# Altium PCB FlightController_Top.PcbDoc
Units mm, origin at the board's own origin, x right, y up, seen from the top; angles counter-clockwise.
Board outline 101.6 x 101.6 mm, 4 copper layers (Top Layer, Internal Plane 1, Internal Plane 2, Bottom Layer); 156 components, 161 nets, 856 pads, 0 vias.
Unrouted connection lines stored in the file: 589.
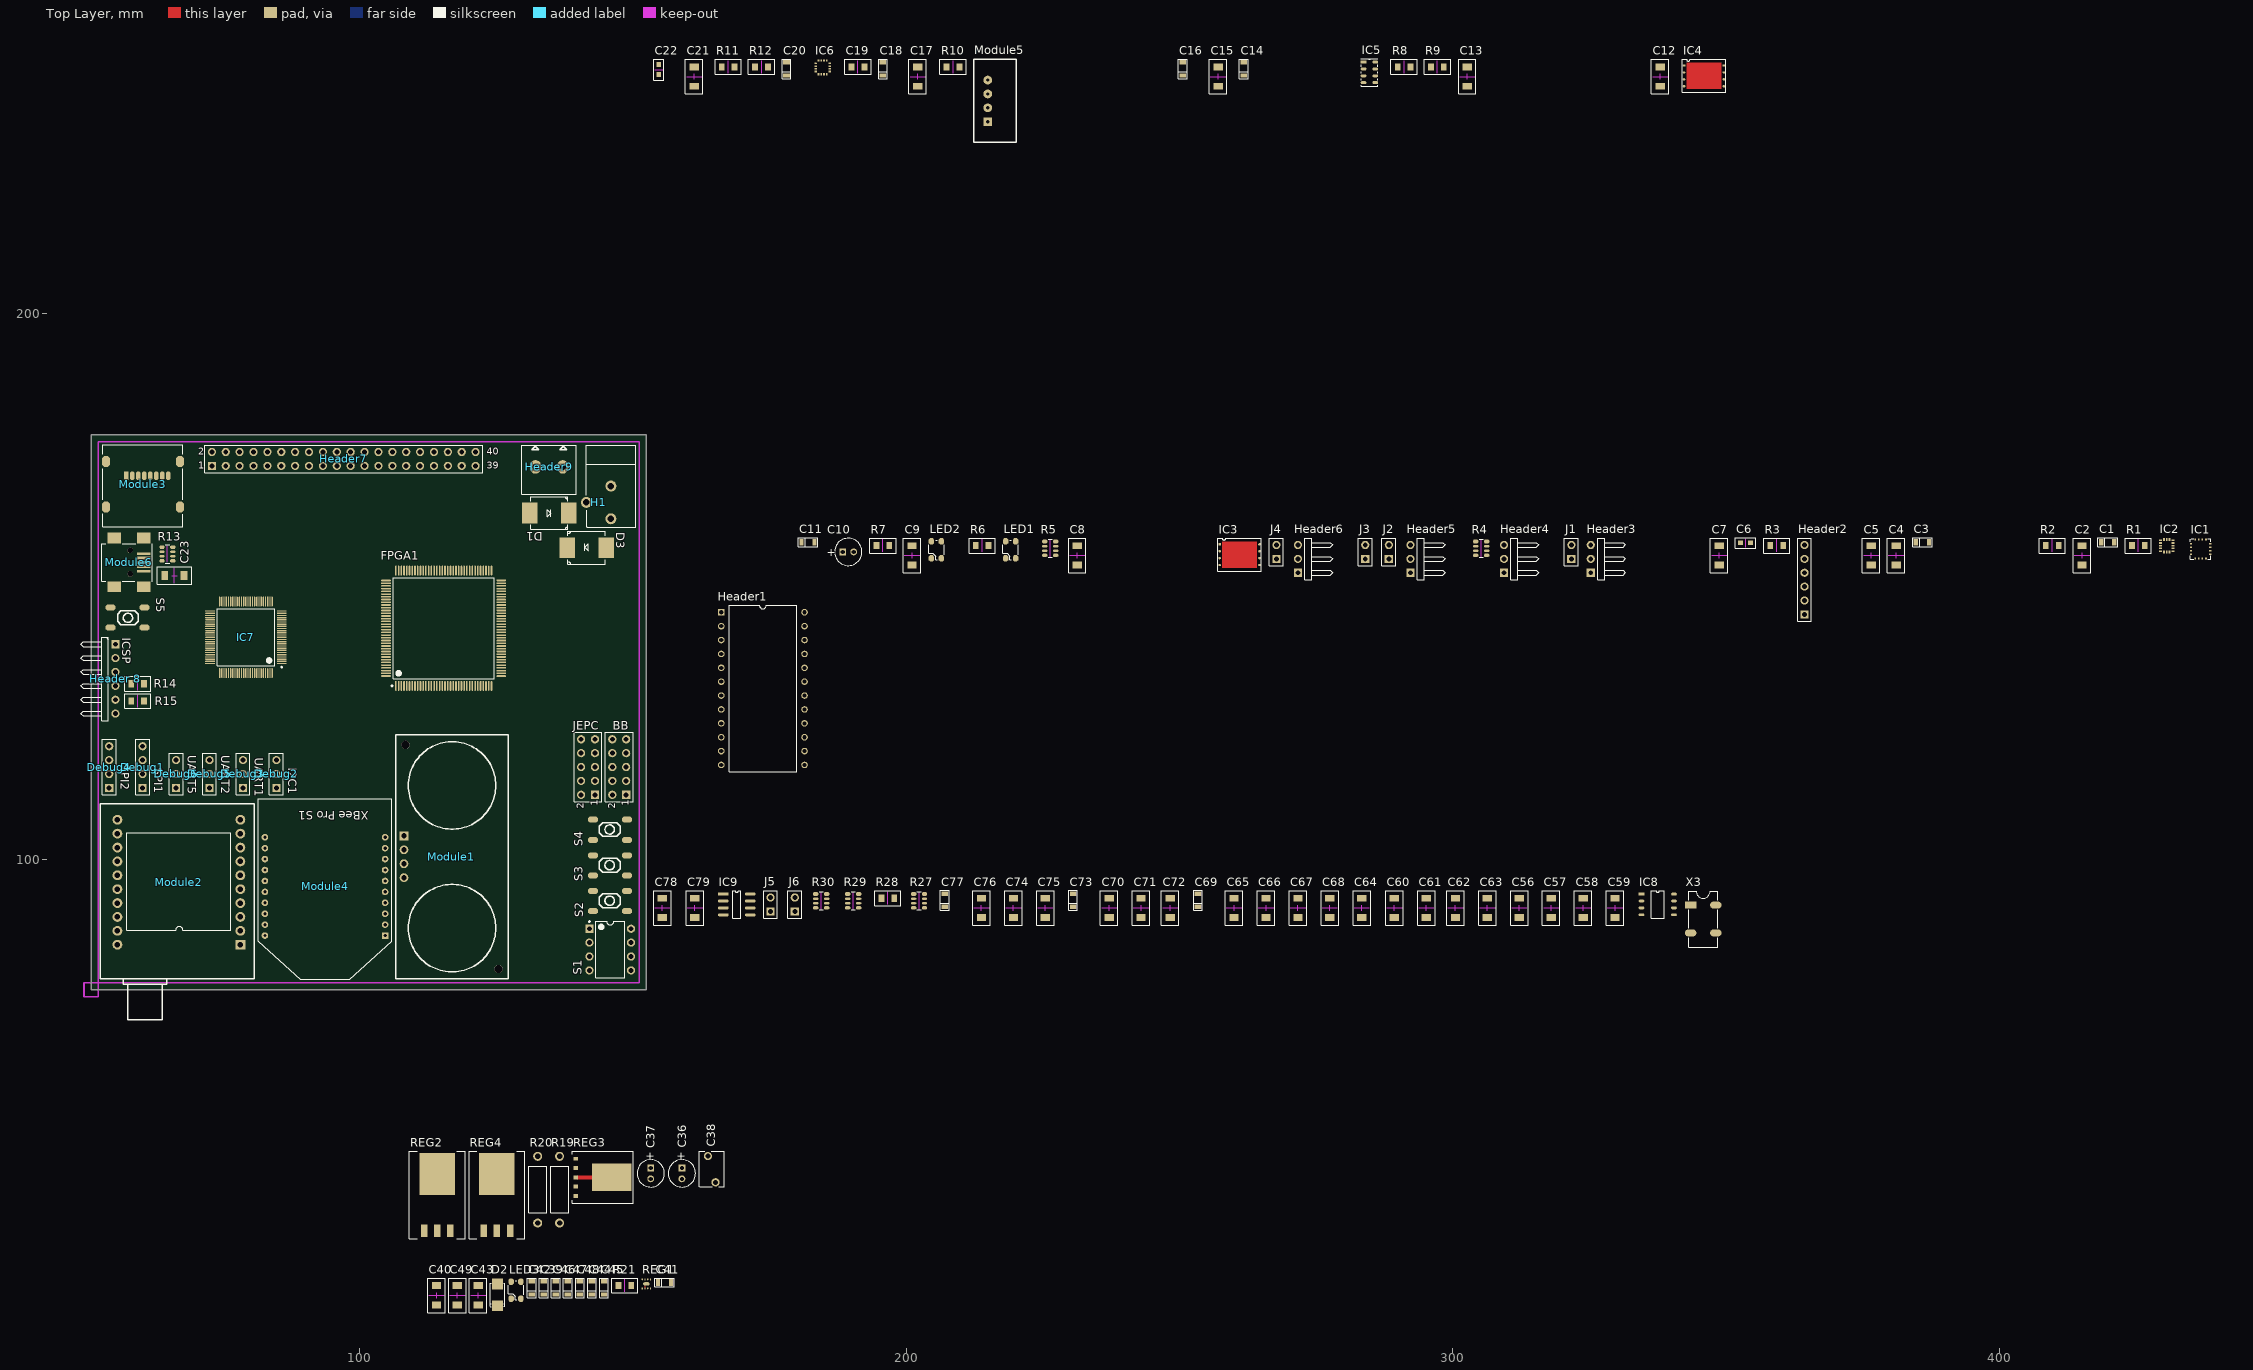
[diagram p0: Top Layer view]
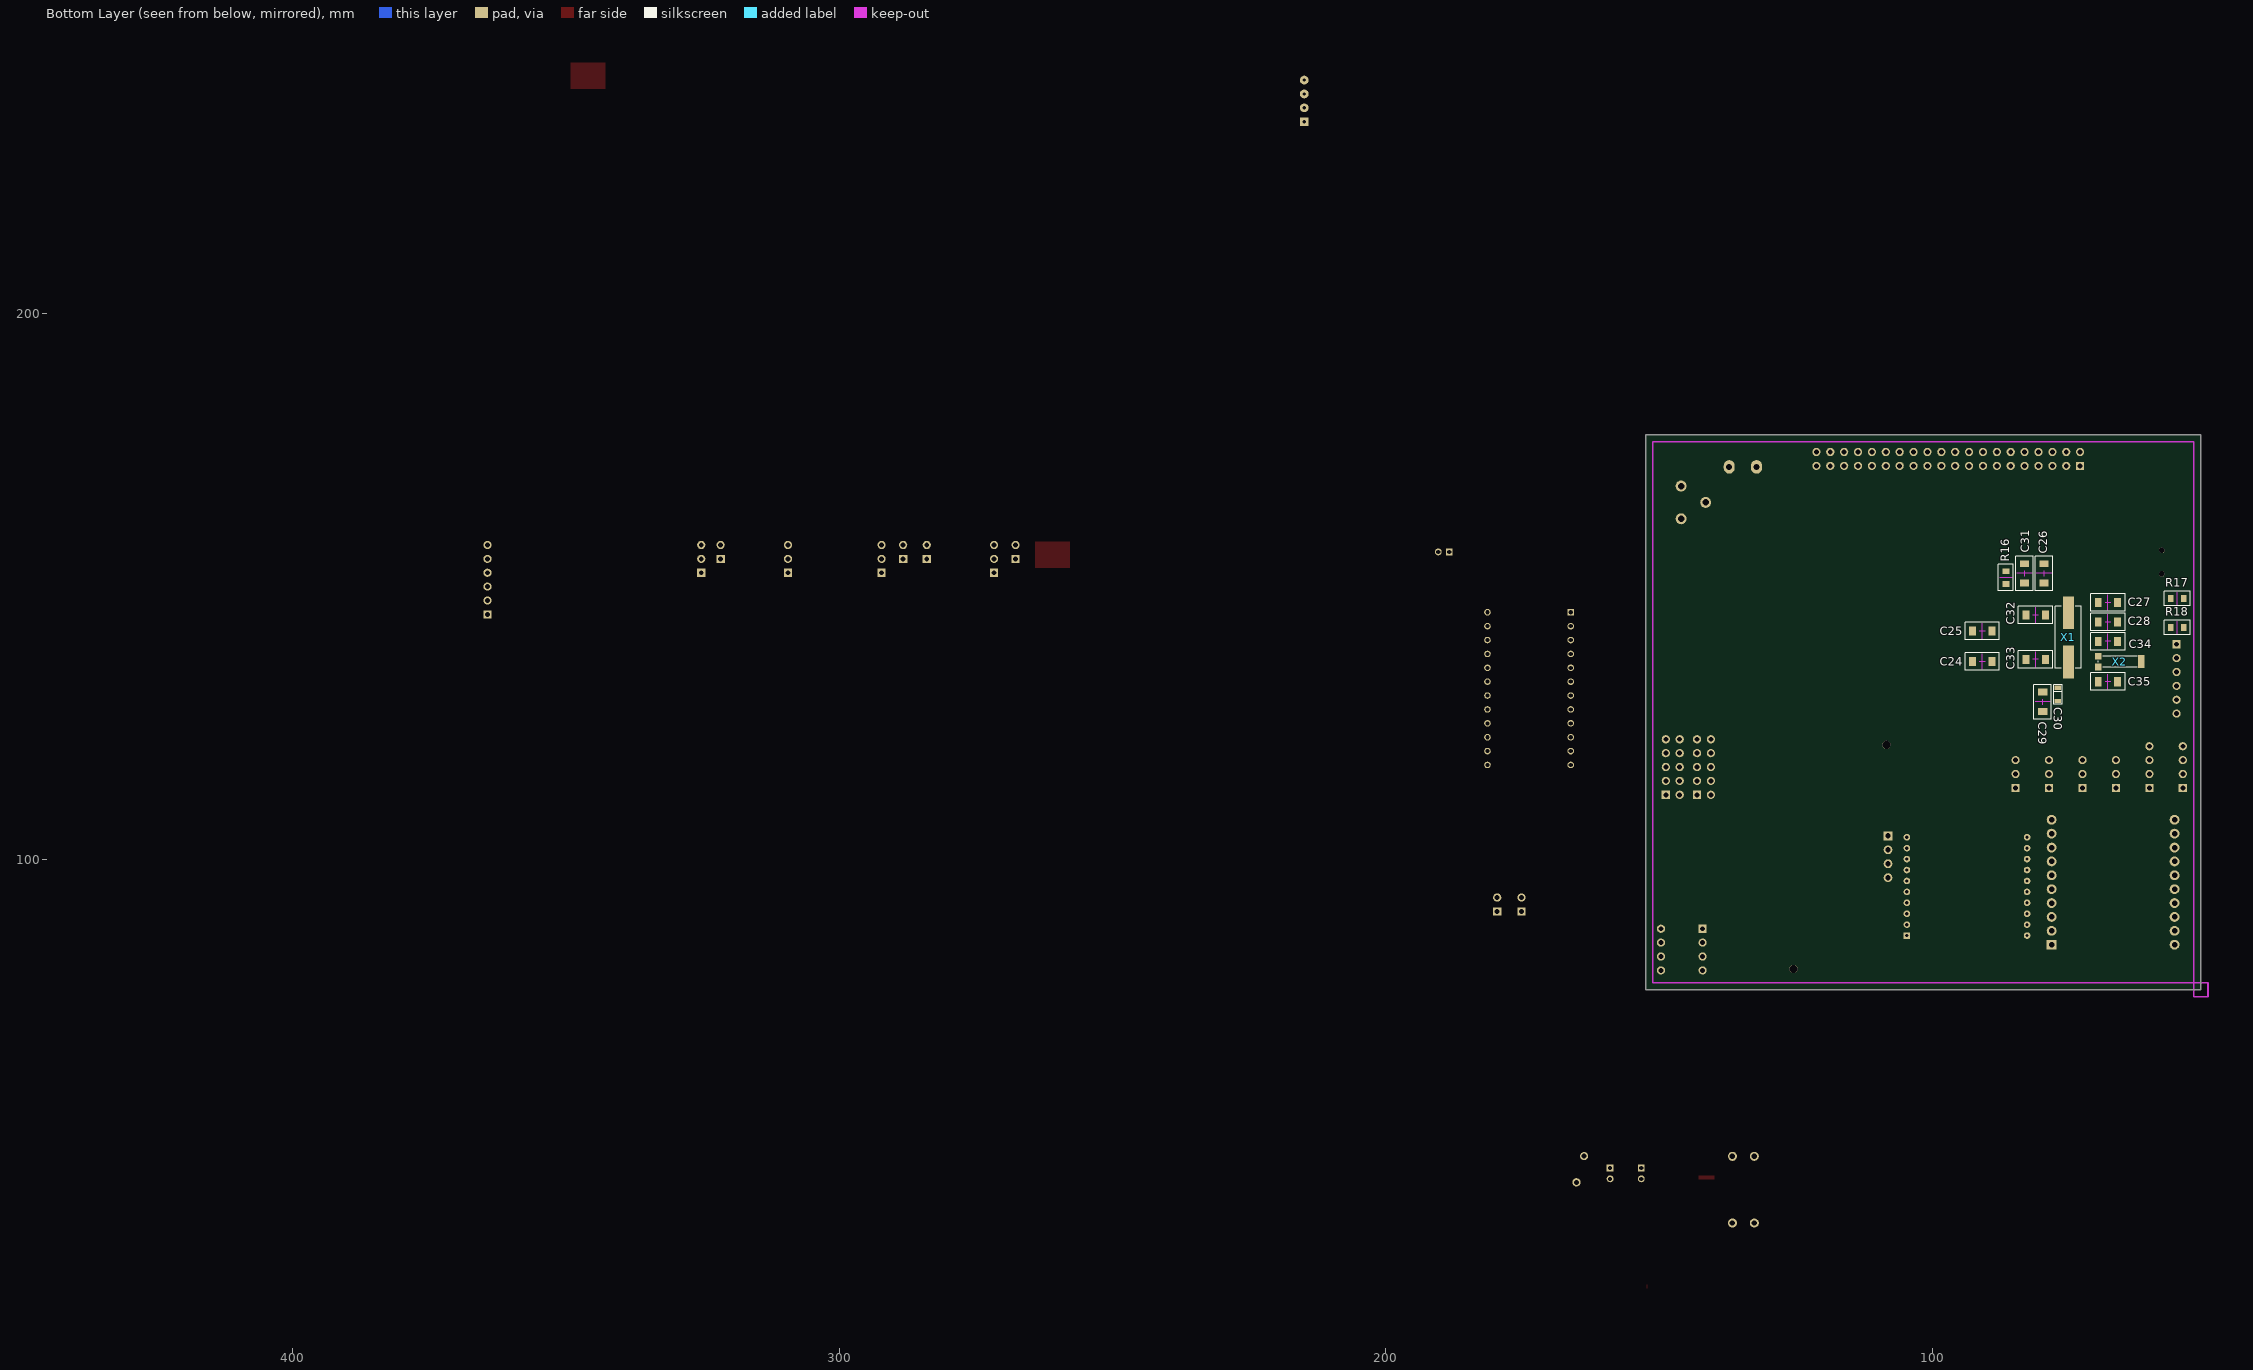
[diagram p1: Bottom Layer view, seen from below]
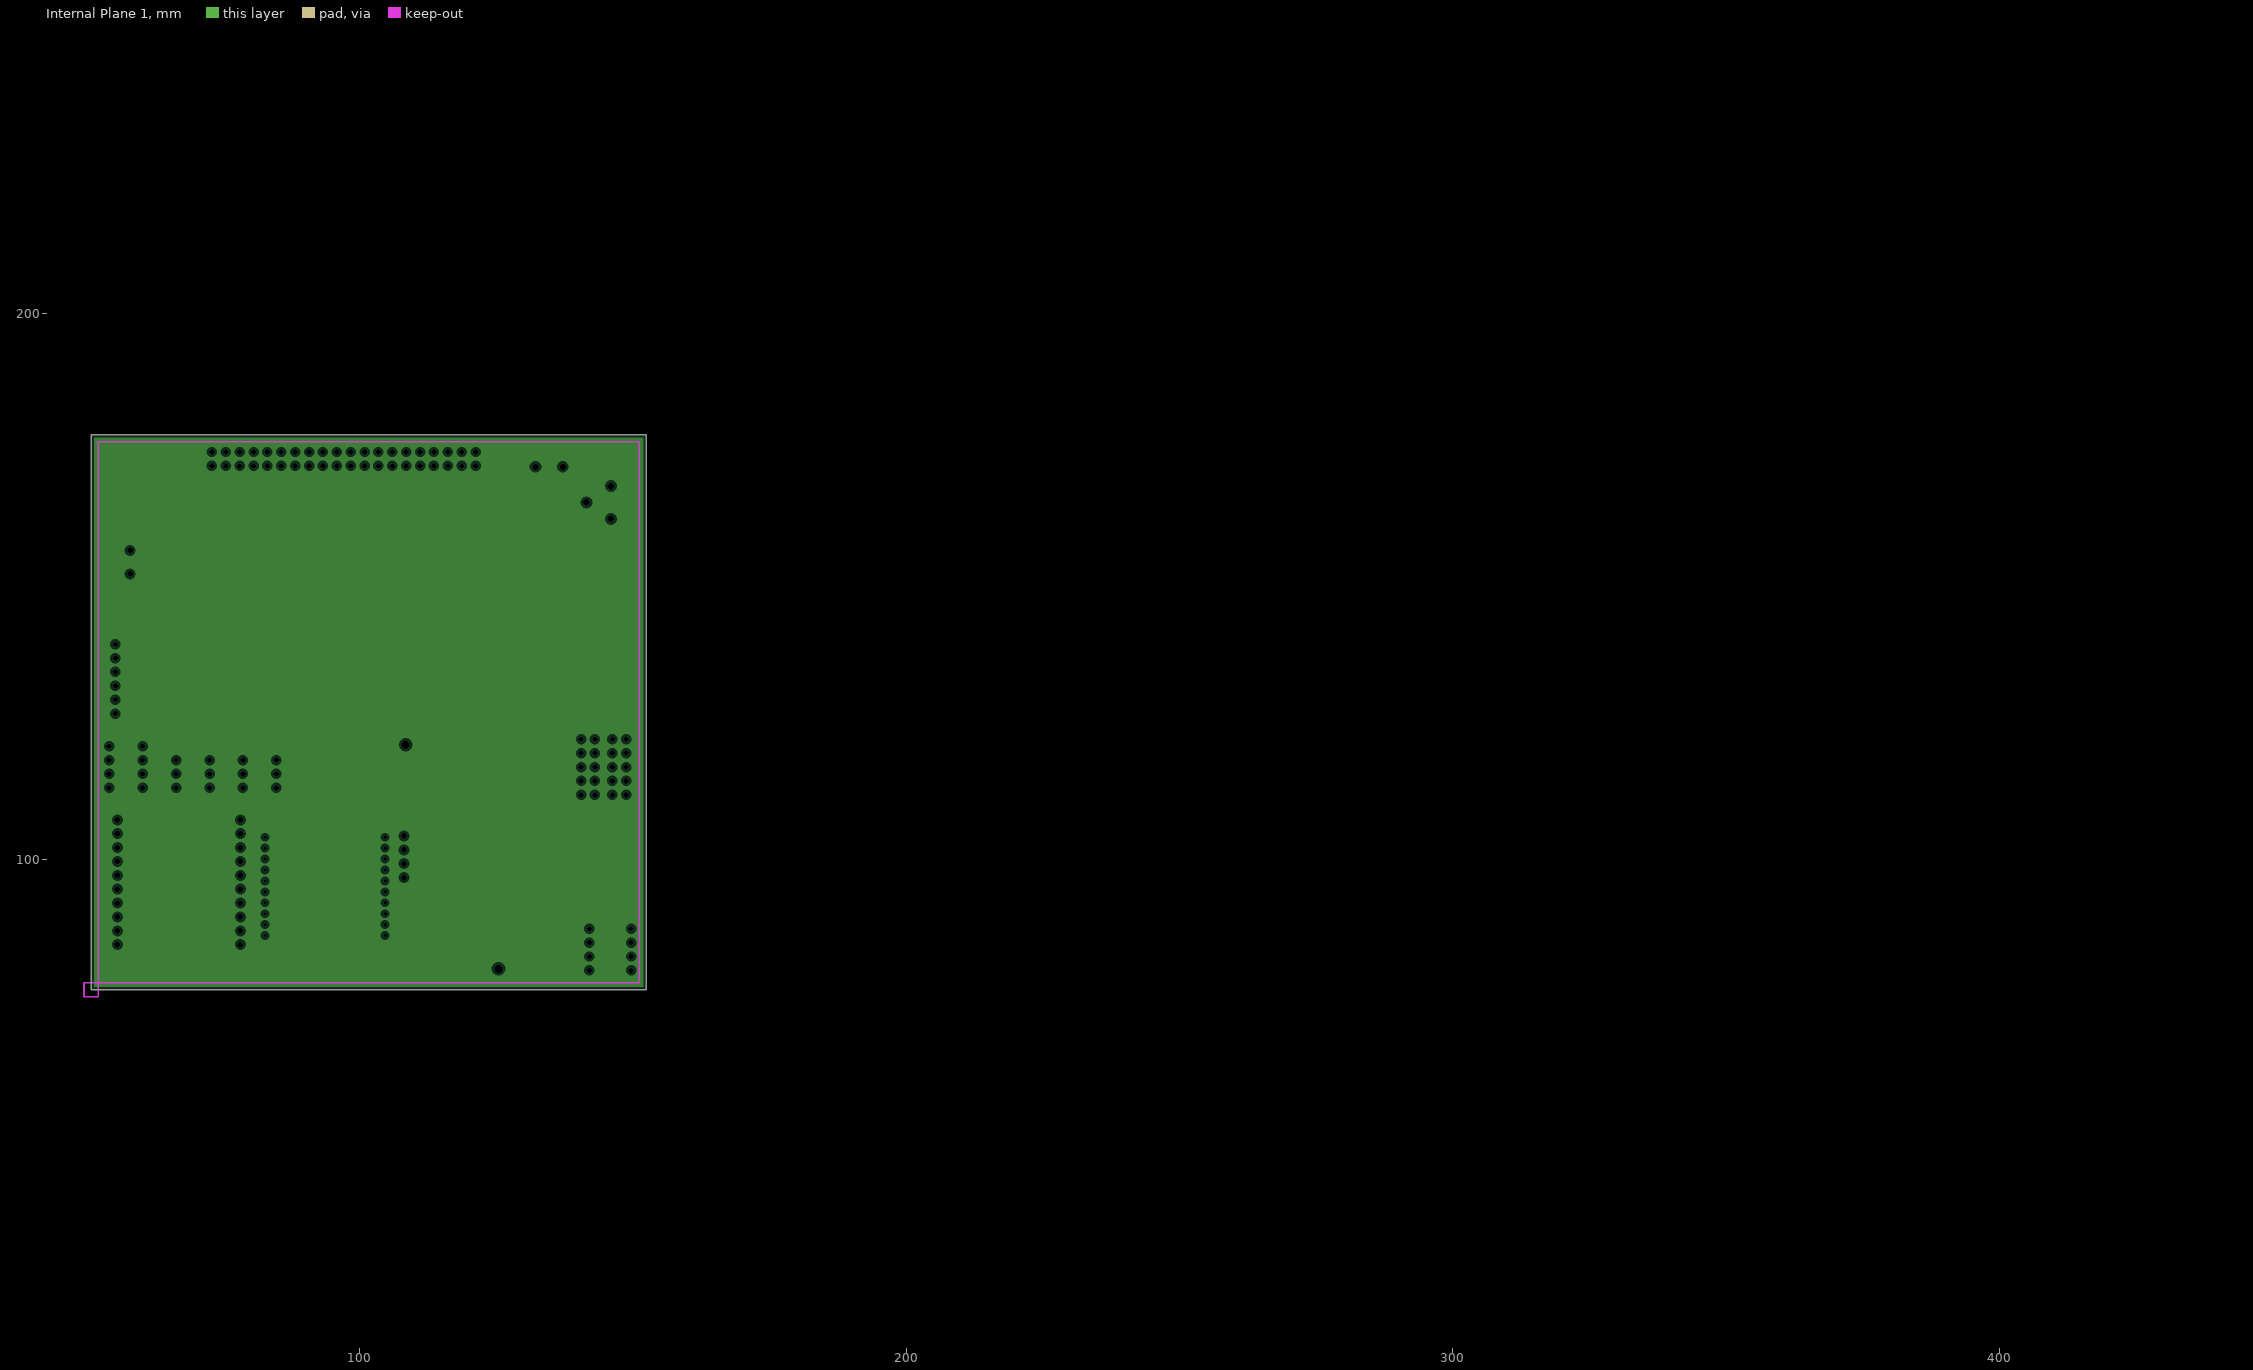
[diagram p2: Internal Plane 1, clearances drawn from the general rule]
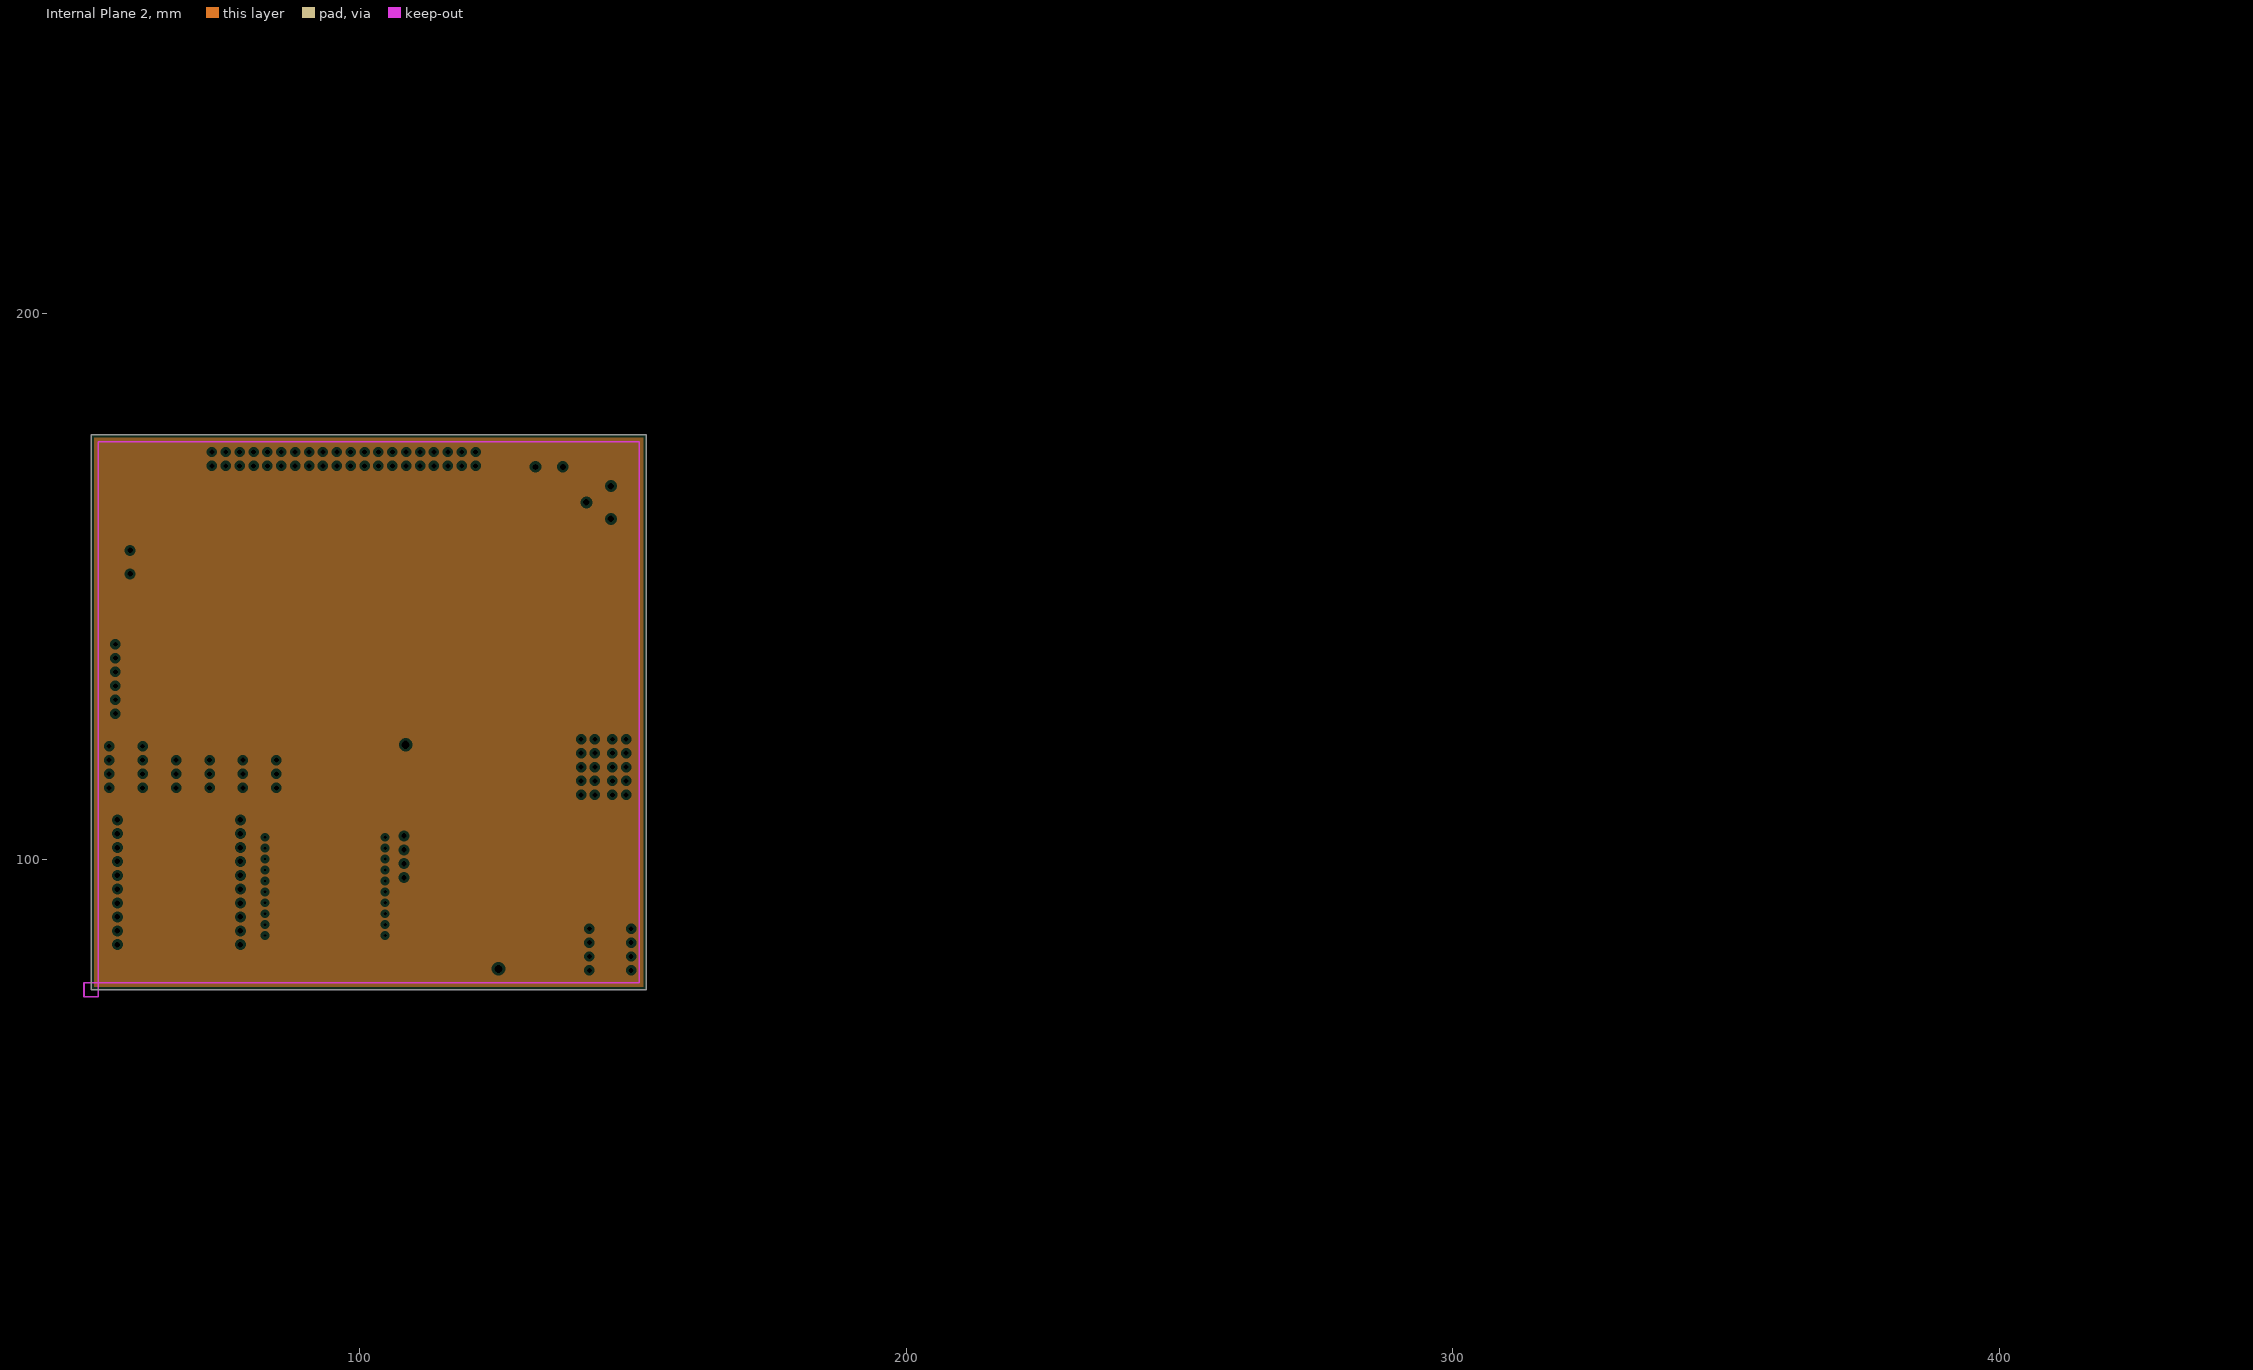
[diagram p3: Internal Plane 2, clearances drawn from the general rule]

## Layer stack, top to bottom
Top Layer: signal copper 0.0356
Dielectric: dielectric 0.32, FR-4, Dk 4.8
Internal Plane 1: plane copper 0.0356
Dielectric: dielectric 0.32, FR-4, Dk 4.8
Internal Plane 2: plane copper 0.0356
Dielectric: dielectric 0.32, FR-4, Dk 4.8
Bottom Layer: signal copper 0.0356

## Board outline
50.8,76.2 152.4,76.2 152.4,177.8 50.8,177.8

## Design rules (kind name [scope] priority, off if disabled: settings)
Clearance [All] p1: gap=0.2
PlaneClearance [All] p1: clearance=0.508
PlaneConnect [All] p1: planeconnectstyle=Relief reliefexpansion=0.508 reliefentries=4 reliefconductorwidth=0.254 reliefairgap=0.254
PolygonConnect [All] p1: connectstyle=Relief reliefconductorwidth=0.254 reliefentries=4 polygonreliefangle="90 Angle"
RoomDefinition Power [InComponentClass('Power')] p1: confinementstyle=ConfineIn formatcopy=TRUE lockcomponents=FALSE outline 112.251,9.652 165.1,9.652 165.1,51.427 112.251,51.427
RoomDefinition FPGA_Clocks [InComponentClass('FPGA_Clocks')] p2: confinementstyle=ConfineIn formatcopy=TRUE lockcomponents=FALSE outline 153.543,77.724 375.92,77.724 375.92,97.155 153.543,97.155
RoutingVias [All] p1: holewidth=0.4 width=1 viastyle="Through Hole" minholewidth=0.711 minwidth=1.27 maxholewidth=0.711 maxwidth=1.27
SilkscreenOverComponentPads [All] p1: minsilkscreentomaskgap=0.254
SolderMaskExpansion [All] p1: expansion=0.102
Width [All] p1: maxlimit=0.2 minlimit=0.2 preferedwidth=0.2
25 further rules are at their usual default settings.

## Classes and differential pairs
component class FPGA_Clocks: BB C56 C57 C58 C59 C60 C61 C62 C63 C64 C65 C66 C67 C68 C69 C70 C71 C72 C73 C74 C75 C76 C77 C78 C79 IC8 IC9 J5 J6 JEPC R27 R28 R29 R30 X3
component class FPGA_Components: C1 C2 C3 C4 C5 C6 C7 C8 C9 C10 C11 Header1 Header2 Header3 Header4 Header5 Header6 IC1 IC2 IC3 J1 J2 J3 J4 LED1 LED2 Module1 R1 R2 R3 R4 R5 R6 R7 S1 S2 S3 S4
component class FPGA_Core: FPGA1 Header7
component class Navigator_Components: C12 C13 C14 C15 C16 C17 C18 C19 C20 C21 C22 IC4 IC5 IC6 Module2 Module3 Module4 Module5 R8 R9 R10 R11 R12
component class Navigator_Connectors: C23 Debug1 Debug2 Debug3 Debug4 Debug5 Debug6 "Header 8" Module6 R13 R14 R15
component class Navigator_Core: C24 C25 C26 C27 C28 C29 C30 C31 C32 C33 C34 C35 IC7 R16 R17 R18 S5 X1 X2
component class Power: C36 C37 C38 C39 C40 C41 C42 C43 C44 C45 C46 C47 C48 C49 D1 D2 D3 H1 Header9 LED3 R19 R20 R21 REG1 REG2 REG3 REG4

## Components (designator, comment, footprint, x,y, rotation, side; value= is the part's Value field where it differs from the comment)
BB "Header 5X2" HDR2X5 148.717,111.887 r90 top (schematic designator Header13)
C1 "10uF Low-ESR Tantalum CaseA" "Capacitor - Tantalum Case A" 419.862,158.115 r0 top
C2 "0.1uF SMD 1206" "SMD 1206" 415.163,155.702 r90 top
C3 "4.7uF Low-ESR Tantalum CaseA" "Capacitor - Tantalum Case A" 385.953,158.115 r0 top
C4 "0.1uF SMD 1206" "SMD 1206" 381.127,155.702 r90 top
C5 "0.1uF SMD 1206" "SMD 1206" 376.555,155.702 r90 top
C6 "470nF SMD 0603" "SMD 0603" 353.568,157.988 r0 top
C7 "0.1uF SMD 1206" "SMD 1206" 348.742,155.702 r90 top
C8 "0.1uF SMD 1206" "SMD 1206" 231.267,155.702 r90 top
C9 "0.1uF SMD 1206" "SMD 1206" 201.041,155.702 r90 top
C10 "10uF Electrolitic" CAPPR2-5x5 189.357,156.337 r0 top
C11 "1.0uF Low-ESR Tantalum CaseA" "Capacitor - Tantalum Case A" 181.991,158.115 r0 top
C12 "0.1uF SMD 1206" "SMD 1206" 337.947,243.332 r90 top
C13 "0.1uF SMD 1206" "SMD 1206" 302.641,243.332 r90 top
C14 "1.0uF Low-ESR Tantalum CaseA" "Capacitor - Tantalum Case A" 261.747,244.729 r90 top
C15 "0.1uF SMD 1206" "SMD 1206" 257.048,243.332 r90 top
C16 "1.0uF Low-ESR Tantalum CaseA" "Capacitor - Tantalum Case A" 250.571,244.729 r90 top
C17 "0.1uF SMD 1206" "SMD 1206" 202.057,243.332 r90 top
C18 "1.0uF Low-ESR Tantalum CaseA" "Capacitor - Tantalum Case A" 195.707,244.729 r90 top
C19 "8.2pF SMD 0805" "SMD 0805" 191.135,245.11 r0 top
C20 "4.7uF Low-ESR Tantalum CaseA" "Capacitor - Tantalum Case A" 178.054,244.729 r90 top
C21 "0.1uF SMD 1206" "SMD 1206" 161.163,243.332 r90 top
C22 "220nF SMD 0603" "SMD 0603" 154.686,244.602 r90 top
C23 "0.1uF SMD 1206" "SMD 1206" 66.04,152.019 r0 top
C24 "0.1uF SMD 1206" "SMD 1206" 90.805,136.271 r0 bottom
C25 "0.1uF SMD 1206" "SMD 1206" 90.805,141.859 r0 bottom
C26 "0.1uF SMD 1206" "SMD 1206" 79.502,152.4 r90 bottom
C27 "0.1uF SMD 1206" "SMD 1206" 67.818,147.066 r180 bottom
C28 "0.1uF SMD 1206" "SMD 1206" 67.818,143.51 r180 bottom
C29 "0.1uF SMD 1206" "SMD 1206" 79.756,128.905 r270 bottom
C30 "10uF Low-ESR Tantalum CaseA" "Capacitor - Tantalum Case A" 76.962,130.255 r270 bottom
C31 "0.1uF SMD 1206" "SMD 1206" 83.058,152.4 r90 bottom
C32 "22pF SMD 1206" "SMD 1206" 81.026,144.78 r180 bottom
C33 "22pF SMD 1206" "SMD 1206" 81.026,136.652 r180 bottom
C34 "22pF SMD 1206" "SMD 1206" 67.818,139.954 r0 bottom
C35 "22pF SMD 1206" "SMD 1206" 67.818,132.588 r0 bottom
C36 "1.0uF Electrolitic" CAPPR2-5x5 158.912,42.603 r270 top
C37 "10uF Electrolitic" CAPPR2-5x5 153.204,42.603 r270 top
C38 "0.1uF Ceramic" CAPRD5-6.5x4.5 164.37,43.37 r90 top
C39 "1.0uF Low-ESR Tantalum CaseA" "Capacitor - Tantalum Case A" 133.626,21.637 r90 top
C40 "0.1uF SMD 1206" "SMD 1206" 114.014,20.287 r90 top
C41 "10uF Low-ESR Tantalum CaseA" "Capacitor - Tantalum Case A" 155.743,22.637 r0 top
C42 "1.0uF Low-ESR Tantalum CaseA" "Capacitor - Tantalum Case A" 131.418,21.637 r90 top
C43 "0.1uF SMD 1206" "SMD 1206" 121.63,20.287 r90 top
C44 "1.0uF Low-ESR Tantalum CaseA" "Capacitor - Tantalum Case A" 142.458,21.637 r90 top
C45 "1.0uF Low-ESR Tantalum CaseA" "Capacitor - Tantalum Case A" 144.666,21.637 r90 top
C46 "10uF Low-ESR Tantalum CaseA" "Capacitor - Tantalum Case A" 135.834,21.637 r90 top
C47 "10uF Low-ESR Tantalum CaseA" "Capacitor - Tantalum Case A" 138.042,21.637 r90 top
C48 "1.0uF Low-ESR Tantalum CaseA" "Capacitor - Tantalum Case A" 140.25,21.637 r90 top
C49 "0.1uF SMD 1206" "SMD 1206" 117.822,20.287 r90 top
C56 "0.1uF SMD 1206" "SMD 1206" 312.166,91.186 r90 top
C57 "0.1uF SMD 1206" "SMD 1206" 318.008,91.186 r90 top
C58 "0.1uF SMD 1206" "SMD 1206" 323.85,91.186 r90 top
C59 "0.1uF SMD 1206" "SMD 1206" 329.692,91.186 r90 top
C60 "0.1uF SMD 1206" "SMD 1206" 289.306,91.186 r90 top
C61 "0.1uF SMD 1206" "SMD 1206" 295.148,91.186 r90 top
C62 "0.1uF SMD 1206" "SMD 1206" 300.482,91.186 r90 top
C63 "0.1uF SMD 1206" "SMD 1206" 306.324,91.186 r90 top
C64 "0.1uF SMD 1206" "SMD 1206" 283.337,91.186 r90 top
C65 "0.1uF SMD 1206" "SMD 1206" 259.969,91.186 r90 top
C66 "0.1uF SMD 1206" "SMD 1206" 265.811,91.186 r90 top
C67 "0.1uF SMD 1206" "SMD 1206" 271.653,91.186 r90 top
C68 "0.1uF SMD 1206" "SMD 1206" 277.495,91.186 r90 top
C69 "1.0uF Low-ESR Tantalum CaseA" "Capacitor - Tantalum Case A" 253.365,92.583 r90 top
C70 "0.1uF SMD 1206" "SMD 1206" 237.109,91.186 r90 top
C71 "0.1uF SMD 1206" "SMD 1206" 242.951,91.186 r90 top
C72 "0.1uF SMD 1206" "SMD 1206" 248.285,91.186 r90 top
C73 "1.0uF Low-ESR Tantalum CaseA" "Capacitor - Tantalum Case A" 230.505,92.583 r90 top
C74 "0.1uF SMD 1206" "SMD 1206" 219.583,91.186 r90 top
C75 "0.1uF SMD 1206" "SMD 1206" 225.425,91.186 r90 top
C76 "0.1uF SMD 1206" "SMD 1206" 213.741,91.186 r90 top
C77 "1.0uF Low-ESR Tantalum CaseA" "Capacitor - Tantalum Case A" 207.01,92.583 r90 top
C78 "0.1uF SMD 1206" "SMD 1206" 155.321,91.186 r90 top
C79 "10nF SMD 1206" "SMD 1206" 161.29,91.186 r90 top
D1 "MBRS540T3G" MBRS540T3G 134.62,163.449 r180 top
D2 "1SMAS913BT3G" 1SMA5913BT3G 125.168,20.385 r90 top
D3 "MBRS540T3G" MBRS540T3G 141.478,157.099 r0 top
Debug1 "SPI1" HDR1X4 60.223,113.157 r90 top
Debug2 "I2C1" HDR1X3 84.709,113.157 r90 top
Debug3 "UART1" HDR1X3 78.588,113.157 r90 top
Debug4 "SPI2" HDR1X4 54.102,113.157 r90 top
Debug5 "UART2" HDR1X3 72.466,113.157 r90 top
Debug6 "UART5" HDR1X3 66.345,113.157 r90 top
FPGA1 "EP2C8T144C8N" TQFP144_N 115.316,142.367 r90 top locked
H1 "DC Jack" "DC Power Jack" 145.923,175.895 r90 top
Header1 "L3G4200D Header" DIP24 166.116,145.288 r0 top
Header2 "Header 6" HDR1X6 364.363,144.907 r90 top
Header3 "Header 3H" HDR1X3H 325.247,152.527 r90 top
Header4 "Header 3H" HDR1X3H 309.372,152.527 r90 top
Header5 "Header 3H" HDR1X3H 292.227,152.527 r90 top
Header6 "Header 3H" HDR1X3H 271.653,152.527 r90 top
Header7 "Header 20X2H" HDR2X20 72.898,172.085 r0 top locked
Header9 "Battery Conn" "PC Wire Connector" 134.62,171.895 r0 top
"Header 8" "ICSP" HDR1X6H 55.245,139.446 r270 top (schematic designator Header8)
IC1 "L3G4200D" L3G4200DTR 435.102,157.861 r0 top
IC2 "MMA8452Q" MMA8452QT 430.657,157.48 r0 top
IC3 "S25FL128P" S25FL128P 260.985,155.829 r0 top
IC4 "S25FL128P" S25FL128P 345.948,243.459 r0 top
IC5 "MPL115A1" MPL115A1 284.734,244.094 r0 top
IC6 "HMC5883L" HMC5883L-TR 183.388,245.745 r0 top
IC7 "PIC32MX795F512L-80I/PT" TQFP-PT100_N 79.121,140.716 r180 top locked
IC8 "EPCS16SI8N" "EPCS16SI8N SO-8" 335.026,93.726 r0 top
IC9 "DS1085" "DS1085 SO-150mil" 166.497,93.726 r0 top
J1 "Jumper" HDR1X2 321.691,155.067 r90 top
J2 "Jumper" HDR1X2 288.29,155.067 r90 top
J3 "Jumper" HDR1X2 283.972,155.067 r90 top
J4 "Jumper" HDR1X2 267.716,155.067 r90 top
J5 "Jumper" HDR1X2 175.133,90.551 r90 top
J6 "Jumper" HDR1X2 179.578,90.551 r90 top
JEPC "Header 5X2" HDR2X5 143.002,111.887 r90 top (schematic designator Header12)
LED1 "LED PLCC-4" "PLCC-4 LED" 219.075,156.718 r90 top
LED2 "LED PLCC-4" "PLCC-4 LED" 205.486,156.718 r90 top
LED3 "LED PLCC-4" "PLCC-4 LED" 128.558,21.235 r90 top
Module1 "HC-SR04 Ultrasonic Module" "HC-SR04 Ultrasonic Ranger" 106.553,78.232 r90 top
Module2 "Copernicus II DIP Module" "Copernicus GPS Module" 80.645,78.232 r180 top
Module3 "MicroSD Socket" "MicroSD Card Slot" 67.056,160.909 r180 top locked
Module4 "XBee Pro S1" "XBee Pro S1 Wireless Module" 93.599,95.123 r180 top
Module5 "RHT03" "RHT03 Humidity Sensor" 212.344,231.267 r90 top
Module6 "Mini-USB" "Mini B USB Connector" 52.705,157.861 r270 top locked
R1 "4.7K SMD 0805" "SMD 0805" 425.45,157.48 r0 top
R2 "4.7K SMD 0805" "SMD 0805" 409.702,157.48 r0 top
R3 "10K SMD 0805" "SMD 0805" 359.283,157.48 r0 top
R4 "Value: 10K SMD Resistor Array" "Resistor Array YC164" 305.181,156.972 r0 top
R5 "Value: 10K SMD Resistor Array" "Resistor Array YC164" 226.314,156.972 r0 top
R6 "1K SMD 0805" "SMD 0805" 213.868,157.48 r0 top
R7 "1K SMD 0805" "SMD 0805" 195.707,157.48 r0 top
R8 "10K SMD 0805" "SMD 0805" 291.084,245.11 r0 top
R9 "10K SMD 0805" "SMD 0805" 297.18,245.11 r0 top
R10 "1K SMD 0805" "SMD 0805" 208.534,245.11 r0 top
R11 "2.2K SMD 0805" "SMD 0805" 167.386,245.11 r0 top
R12 "2.2K SMD 0805" "SMD 0805" 173.482,245.11 r0 top
R13 "Value: 10K SMD Resistor Array" "Resistor Array YC164" 64.77,155.956 r0 top
R14 "100 SMD 0805" "SMD 0805" 59.309,132.207 r0 top
R15 "100 SMD 0805" "SMD 0805" 59.309,129.032 r0 top
R16 "10 SMD 0805" "SMD 0805" 86.487,151.638 r90 bottom
R17 "10K SMD 0805" "SMD 0805" 55.118,147.828 r0 bottom
R18 "100 SMD 0805" "SMD 0805" 55.118,142.494 r180 bottom
R19 "3.9K Radial" RES12.2-8.5X3.3 136.523,39.62 r90 top
R20 "1.3K Radial" RES12.2-8.5X3.3 132.515,39.62 r90 top
R21 "1K SMD 0805" "SMD 0805" 148.474,22.087 r0 top
R27 "Value: 10K SMD Resistor Array" "Resistor Array YC164" 202.311,92.456 r0 top
R28 "10K SMD 0805" "SMD 0805" 196.596,92.964 r0 top
R29 "Value: 10K SMD Resistor Array" "Resistor Array YC164" 190.246,92.456 r0 top
R30 "Value: 10K SMD Resistor Array" "Resistor Array YC164" 184.404,92.456 r0 top
REG1 "MIC5330-MFYML" "MIC5330-MFYML TR" 152.408,22.385 r90 top
REG2 "MIC29300-5.0WU" "TO-263 D2PACK" 114.149,32.128 r90 top
REG3 "MIC49300-1.2WR" "MIC49300-1.2WR SPACK-5" 139.496,41.878 r0 top
REG4 "MIC29300-3.3WU" "TO-263 D2PACK" 125.057,32.128 r90 top
S1 "SW-DIP4" DIP-8 145.796,83.566 r0 top
S2 "SMD Tactile Switch" "SMD Tactile Switch" 148.863,90.598 r180 top
S3 "SMD Tactile Switch" "SMD Tactile Switch" 148.863,97.115 r180 top
S4 "SMD Tactile Switch" "SMD Tactile Switch" 148.863,103.632 r180 top
S5 "SMD Tactile Switch" "SMD Tactile Switch" 54.356,146.177 r0 top locked
X1 "XT9M20ANA8M" "XT9M20ANA8M - 8MHz Capacitor" 75.057,140.716 r90 bottom
X2 "SSP-T6-7PF-20PPM" "32.768KHz Crystal" 69.596,136.271 r270 bottom
X3 "SE2838CT-ND" "SG-636PCE 25.175MHz Crystal" 345.821,89.154 r0 top

## Footprints (in the part's own frame and the unit in brackets; to place one, negate y for a bottom-side part, rotate by r counter-clockwise, add the part's x,y. Pads: shape width x height; smd on the part's side, far side on the other; paste and mask are expansions set on the pad)
1SMA5913BT3G [mm]
  rect 2x2 smd: A(2,0) K(-2,0)
  silkscreen extent -2.16,-1.33 2.13,1.33
"32.768KHz Crystal" [mm]
  rect 1.2x1.2 smd: 1(-1,0) 2(1,0)
  rect 2.4x1.2 smd: NC(0,7.9)
  silkscreen extent -1,0 1,7.11
"Capacitor - Tantalum Case A" [mm]
  rect 0.8x1.2 smd: 1(-1.2,0) 2(1.2,0)
  silkscreen extent -1.8,-0.8 1.8,0.8
CAPPR2-5x5 [mm] "Capacitor, Electrolytic, Radial; Body 5 x 5 mm (Dia.xH typ); Pin Spacing 2 mm (typ)"
  rect 1.25x1.25 hole 0.75: 1(-1,0)
  round 1.25 hole 0.75: 2(1,0)
  silkscreen extent -2.5,-2.5 2.5,2.5
CAPRD5-6.5x4.5 [mm] "Capacitor, Ceramic, Thru-Hole, Disc; Body 6.5 x 4.5 mm (LxW max) Pin Spacing 5 mm (typ)"
  round 1.5 hole 0.9: 1(-2.4,-0.7) 2(2.4,0.7)
  silkscreen extent -3.25,-2.25 3.25,2.25
"Copernicus GPS Module" [mm]
  rect 1.8x1.8 hole 1: 1(2.54,-6.223)
  round 1.8 hole 1: 2(2.54,-8.763) 3(2.54,-11.303) 4(2.54,-13.843) 5(2.54,-16.383) 6(2.54,-18.923) 7(2.54,-21.463) 8(2.54,-24.003) 9(2.54,-26.543) 10(2.54,-29.083) 11(25.04,-29.083) 12(25.04,-26.543) 13(25.04,-24.003) 14(25.04,-21.463) 15(25.04,-18.923) 16(25.04,-16.383) 17(25.04,-13.843) 18(25.04,-11.303) 19(25.04,-8.763) 20(25.04,-6.223)
  silkscreen extent 0,-32 28.15,7.5
"DC Power Jack" [mm]
  round 2 hole 1.2: IN(-7.5,0) NC(-10.5,4.5) OUT(-13.5,0)
  silkscreen extent -15,-4.5 0,4.5
DIP24 [mm]
  rect 1.2x1.2 hole 0.75: 1(0,0)
  round 1.2 hole 0.75: 2(0,-2.54) 3(0,-5.08) 4(0,-7.62) 5(0,-10.16) 6(0,-12.7) 7(0,-15.24) 8(0,-17.78) 9(0,-20.32) 10(0,-22.86) 11(0,-25.4) 12(0,-27.94) 13(15.24,-27.94) 14(15.24,-25.4) 15(15.24,-22.86) 16(15.24,-20.32) 17(15.24,-17.78) 18(15.24,-15.24) 19(15.24,-12.7) 20(15.24,-10.16) 21(15.24,-7.62) 22(15.24,-5.08) 23(15.24,-2.54) 24(15.24,0)
  silkscreen extent 1.43,-29.21 13.81,1.27
DIP-8 [mm] "DIP; 8 Leads; Row Spacing 7.62 mm; Pitch 2.54 mm"
  rect 1.5x1.5 hole 0.9: 1(-3.81,3.81)
  round 1.5 hole 0.9: 2(-3.81,1.27) 3(-3.81,-1.27) 4(-3.81,-3.81) 5(3.81,-3.81) 6(3.81,-1.27) 7(3.81,1.27) 8(3.81,3.81)
  silkscreen extent -3.93,-5.15 2.65,5.23, body extent -3.6,-5.15 3.6,5.15, height 5.08
"DS1085 SO-150mil" [mm]
  rect 1.98x0.53 smd: 1(0,0)
  oval 1.98x0.53 smd: 2(0,-1.27) 3(0,-2.54) 4(0,-3.81) 5(4.93,-3.81) 6(4.93,-2.54) 7(4.93,-1.27) 8(4.93,0)
  silkscreen extent 1.73,-4.44 3.2,0.64
"EPCS16SI8N SO-8" [mm]
  rect 1.04x0.5 smd: 1(-0.5,0)
  oval 1.04x0.5 smd: 2(-0.5,-1.27) 3(-0.5,-2.54) 4(-0.5,-3.81) 5(5.45,-3.81) 6(5.45,-2.54) 7(5.45,-1.27) 8(5.45,0)
  silkscreen extent 1.25,-4.44 3.7,0.64
"HC-SR04 Ultrasonic Ranger" [mm]
  rect 1.6x1.6 hole 1: 1(26.12,-1.5)
  round 1.6 hole 1: 2(23.58,-1.5) 3(21.04,-1.5) 4(18.5,-1.5)
  round 1.5 hole 1.5: NC(1.8,-18.8) NC(42.82,-1.8)
  silkscreen extent 0,-20.6 44.62,0
HDR1X2 [mm] "Connector; Header; 2 Position"
  rect 1.5x1.5 hole 0.9: 1(0,0)
  round 1.5 hole 0.9: 2(2.54,0)
  silkscreen extent -1.27,-1.27 3.81,1.27
HDR1X3 [mm] "Connector; Header; 3 Position"
  rect 1.5x1.5 hole 0.9: 1(0,0)
  round 1.5 hole 0.9: 2(2.54,0) 3(5.08,0)
  silkscreen extent -1.27,-1.27 6.35,1.27
HDR1X3H [mm] "Connector; Header; 3 Position; Right Angle"
  rect 1.5x1.5 hole 0.9: 1(0,0)
  round 1.5 hole 0.9: 2(2.54,0) 3(5.08,0)
  silkscreen extent -1.27,-6.35 6.35,-1.27
HDR1X4 [mm] "Connector; Header; 4 Position"
  rect 1.5x1.5 hole 0.9: 1(0,0)
  round 1.5 hole 0.9: 2(2.54,0) 3(5.08,0) 4(7.62,0)
  silkscreen extent -1.27,-1.27 8.89,1.27
HDR1X6 [mm] "Connector; Header; 6 Position"
  rect 1.5x1.5 hole 0.9: 1(0,0)
  round 1.5 hole 0.9: 2(2.54,0) 3(5.08,0) 4(7.62,0) 5(10.16,0) 6(12.7,0)
  silkscreen extent -1.27,-1.27 13.97,1.27
HDR1X6H [mm] "Connector; Header; 6 Position; Right Angle"
  rect 1.5x1.5 hole 0.9: 1(0,0)
  round 1.5 hole 0.9: 2(2.54,0) 3(5.08,0) 4(7.62,0) 5(10.16,0) 6(12.7,0)
  silkscreen extent -1.27,-6.35 13.97,-1.27
HDR2X5 [mm] "Connector; Header; 5x2 Position"
  rect 1.5x1.5 hole 0.9: 1(0,0)
  round 1.5 hole 0.9: 2(0,2.54) 3(2.54,0) 4(2.54,2.54) 5(5.08,0) 6(5.08,2.54) 7(7.62,0) 8(7.62,2.54) 9(10.16,0) 10(10.16,2.54)
  silkscreen extent -1.27,-1.27 11.43,3.81
HDR2X20 [mm] "Connector; Header; 20x2 Position"
  rect 1.5x1.5 hole 0.9: 1(0,0)
  round 1.5 hole 0.9: 2(0,2.54) 3(2.54,0) 4(2.54,2.54) 5(5.08,0) 6(5.08,2.54) 7(7.62,0) 8(7.62,2.54) 9(10.16,0) 10(10.16,2.54) 11(12.7,0) 12(12.7,2.54) 13(15.24,0) 14(15.24,2.54) 15(17.78,0) 16(17.78,2.54) 17(20.32,0) 18(20.32,2.54) 19(22.86,0) 20(22.86,2.54) 21(25.4,0) 22(25.4,2.54) 23(27.94,0) 24(27.94,2.54) 25(30.48,0) 26(30.48,2.54) 27(33.02,0) 28(33.02,2.54) 29(35.56,0) 30(35.56,2.54) 31(38.1,0) 32(38.1,2.54) 33(40.64,0) 34(40.64,2.54) 35(43.18,0) 36(43.18,2.54) 37(45.72,0) 38(45.72,2.54) 39(48.26,0) 40(48.26,2.54)
  silkscreen extent -1.27,-1.27 49.53,3.81
HMC5883L-TR [mm]
  oval 0.45x0.3 smd: 1(0,0)
  rect 0.45x0.3 smd: 2(0,-0.5) 3(0,-1) 4(0,-1.5) 9(2.55,-1.5) 10(2.55,-1) 11(2.55,-0.5) 12(2.55,0)
  rect 0.3x0.45 smd: 5(0.525,-2.025) 6(1.025,-2.025) 7(1.525,-2.025) 8(2.025,-2.025) 13(2.025,0.525) 14(1.525,0.525) 15(1.025,0.525) 16(0.525,0.525)
L3G4200DTR [mm]
  oval 0.4x0.3 smd: 1(0,0)
  rect 0.4x0.3 smd: 2(0,-0.65) 3(0,-1.3) 4(0,-1.95) 9(3.5,-1.95) 10(3.5,-1.3) 11(3.5,-0.65) 12(3.5,0)
  rect 0.3x0.4 smd: 5(0.775,-2.725) 6(1.425,-2.725) 7(2.075,-2.725) 8(2.725,-2.725) 13(2.725,0.775) 14(2.075,0.775) 15(1.425,0.775) 16(0.775,0.775)
  silkscreen extent -0.15,-2.88 3.65,0.92
MBRS540T3G [mil]
  rect 110x150 smd: A(140.49,0) K(-140.47,0)
  silkscreen extent -134,-118 134,118
"MIC5330-MFYML TR" [mm]
  rect 0.35x0.25 smd: 1(-0.825,0.75)
  oval 0.35x0.25 smd: 2(-0.825,0.25) 3(-0.825,-0.25) 4(-0.825,-0.75) 5(0.825,-0.75) 6(0.825,-0.25) 7(0.825,0.25) 8(0.825,0.75)
  oval 0.6x1.2 smd: 2(0,0)
  Top Layer region: -0.889,0.125 -0.127,0.125 -0.127,0.375 -0.889,0.375
"MIC49300-1.2WR SPACK-5" [mm]
  rect 0.8x0.7 smd: 1(0,3.4) 2(0,1.7) 3(0,0) 4(0,-1.7) 5(0,-3.4)
  rect 7.25x5 smd: 3(6.555,0)
  Top Layer region: 0.356,-0.35 3.277,-0.35 3.277,0.35 0.356,0.35
  silkscreen extent -0.62,-4.75 10.5,4.75
"MicroSD Card Slot" [mm]
  rect 0.8x1.5 smd: 1(9.859,-9.35)
  oct 0.8x1.5 smd: 2(8.759,-9.35) 3(7.659,-9.35) 4(6.559,-9.35) 5(5.459,-9.35) 6(4.359,-9.35) 7(3.259,-9.35) 8(2.159,-9.35)
  oct 1.45x2 smd: SHLD(0,-3.65) SHLD(0,-11.95) SHLD(13.56,-3.65) SHLD(13.56,-11.95)
  silkscreen extent -0.51,-15 14.1,0
"Mini B USB Connector" [mm]
  rect 2x2.5 smd: 1(-1,7.7) 1(-1,2.3) 1(7.9,7.7) 1(7.9,2.3)
  round 1 hole 1: 1(1.25,5.25) 1(5.56,5.25)
  rect 0.5x2.5 smd: 1(5.05,7.7) 2(4.25,7.7) 3(3.45,7.7) 4(2.65,7.7) 5(1.85,7.7)
  silkscreen extent 0,0 6.86,9.27
MMA8452QT [mm]
  oval 0.567x0.3 smd: 1(-1.117,1)
  rect 0.567x0.3 smd: 2(-1.117,0.5) 3(-1.117,0) 4(-1.117,-0.5) 5(-1.117,-1) 9(1.117,-1) 10(1.117,-0.5) 11(1.117,0) 12(1.117,0.5) 13(1.117,1)
  rect 0.3x0.567 smd: 6(-0.5,-1.134) 7(0,-1.134) 8(0.5,-1.134) 14(0.5,1.134) 15(0,1.134) 16(-0.5,1.134)
MPL115A1 [mm]
  rect 1.05x0.55 smd: 1(-1.075,1.875)
  oval 1.05x0.55 smd: 2(-1.075,0.625) 3(-1.075,-0.625) 4(-1.075,-1.875) 5(1.075,-1.875) 6(1.075,-0.625) 7(1.075,0.625) 8(1.075,1.875)
  silkscreen extent -1.52,-2.5 1.52,2.5
"PC Wire Connector" [mm]
  oval 2x2.5 hole 1.1: L(-2.5,0) R(2.5,0)
  silkscreen extent -5,-5 5,4
"PLCC-4 LED" [mm]
  oct 1.2x1 smd: 1(-1.55,0.9) 2(1.55,0.9) 3(-1.55,-0.9) 4(1.55,-0.9)
  silkscreen extent -1.78,-1.4 1.75,1.4
RES12.2-8.5X3.3 [mm] "Resistor, Axial; Body 8.5 x 3.3 mm (LxDia. max), Lead Dia. 0.7 mm (max)"
  round 1.65 hole 1: 1(-6.1,0) 2(6.1,0)
  silkscreen extent -4.25,-1.65 4.25,1.65
"Resistor Array YC164" [mm]
  oct 1x0.65 smd: 1(-1,1.275) 4(-1,-1.275) 5(1,-1.275) 8(1,1.275)
  oct 1x0.5 smd: 2(-1,0.4) 3(-1,-0.4) 6(1,-0.4) 7(1,0.4)
  Top Layer keep-out lines w0.1: 0,-1.524 0,1.524
  Mechanical 1 keep-out lines w0.1: -1.905,-1.905 -1.905,1.905 1.905,1.905 1.905,-1.905 -1.905,-1.905
  silkscreen extent -0.38,-1.65 0.38,1.65
"RHT03 Humidity Sensor" [mm]
  rect 1.6x1.6 hole 0.6: 1(3.8,-2.54)
  round 1.6 hole 0.6: 2(6.34,-2.54) 3(8.88,-2.54) 4(11.42,-2.54)
  silkscreen extent 0,-7.75 15.22,0
S25FL128P [mm]
  rect 0.5x0.4 smd: 1(-3.65,1.905)
  oval 0.5x0.4 smd: 2(-3.65,0.635) 3(-3.65,-0.635) 4(-3.65,-1.905) 5(3.65,-1.905) 6(3.65,-0.635) 7(3.65,0.635) 8(3.65,1.905)
  Top Layer region: -3.2,-2.4 3.2,-2.4 3.2,2.4 -3.2,2.4
  silkscreen extent -4,-3 4,3
"SG-636PCE 25.175MHz Crystal" [mm]
  rect 2.1x1.3 smd: 1(-2.3,2.54)
  oval 2.1x1.3 smd: 2(-2.3,-2.54) 3(2.3,-2.54) 4(2.3,2.54)
  silkscreen extent -2.63,-5.13 2.63,5.13
"SMD 0603" [mm]
  rect 0.9x0.8 smd: 1(-0.9,0) 2(0.9,0)
  Top Layer keep-out lines w0.1: 0,-0.762 0,0.762
  Mechanical 1 keep-out lines w0.1: -1.9,-0.95 -1.9,0 -1.9,0.95 1.9,0.95 1.9,-0.95 -1.9,-0.95
  silkscreen extent -1.9,-0.95 1.9,0.95
"SMD 0805" [mm]
  rect 1.05x1.3 smd: 1(-1.175,0) 2(1.175,0)
  Top Layer keep-out lines w0.2: 0,-1.143 0,1.143
  Mechanical 1 keep-out lines w0.1: -2.4,-1.35 2.4,-1.35 2.4,1.35 -2.4,1.35 -2.4,0 -2.4,-1.35
  silkscreen extent -2.4,-1.35 2.4,1.35
"SMD 1206" [mm]
  rect 1.25x1.7 smd: 1(-1.775,0) 2(1.775,0)
  Top Layer keep-out lines w0.2: 0,1.397 0,-1.397 ; -0.508,0 0.508,0
  Mechanical 1 keep-out lines w0.1: -3.15,1.6 3.15,1.6 3.15,-1.6 -3.15,-1.6 -3.15,0 -3.15,1.6
  silkscreen extent -3.15,-1.6 3.15,1.6
"SMD Tactile Switch" [mm]
  oct 1.8x1.1 smd: 1(0,0) 1(6.2,0) 2(0,-3.7) 2(6.2,-3.7)
  Mechanical 1 keep-out lines w0.1: 7.62,1.27 -1.651,1.27 -1.651,-4.953 7.62,-4.953 7.62,1.27
  silkscreen extent 1.27,-3.17 5.08,-0.63
"TO-263 D2PACK" [mm]
  rect 2.3x1.19 smd: 1(0,2.413) 2(0,0) 3(0,-2.413)
  rect 7.696x6.502 smd: 2(10.338,0)
  silkscreen extent -1.5,-5.1 14.5,5.1
TQFP144_N [mm] "Thin QFP, 144-Leads, Body 20x20mm, Pitch 0.5mm, IPC Medium Density"
  oval 1.8x0.3 smd: 1(-10.55,8.75) 2(-10.55,8.25) 3(-10.55,7.75) 4(-10.55,7.25) 5(-10.55,6.75) 6(-10.55,6.25) 7(-10.55,5.75) 8(-10.55,5.25) 9(-10.55,4.75) 10(-10.55,4.25) 11(-10.55,3.75) 12(-10.55,3.25) 13(-10.55,2.75) 14(-10.55,2.25) 15(-10.55,1.75) 16(-10.55,1.25) 17(-10.55,0.75) 18(-10.55,0.25) 19(-10.55,-0.25) 20(-10.55,-0.75) 21(-10.55,-1.25) 22(-10.55,-1.75) 23(-10.55,-2.25) 24(-10.55,-2.75) 25(-10.55,-3.25) 26(-10.55,-3.75) 27(-10.55,-4.25) 28(-10.55,-4.75) 29(-10.55,-5.25) 30(-10.55,-5.75) 31(-10.55,-6.25) 32(-10.55,-6.75) 33(-10.55,-7.25) 34(-10.55,-7.75) 35(-10.55,-8.25) 36(-10.55,-8.75) 73(10.55,-8.75) 74(10.55,-8.25) 75(10.55,-7.75) 76(10.55,-7.25) 77(10.55,-6.75) 78(10.55,-6.25) 79(10.55,-5.75) 80(10.55,-5.25) 81(10.55,-4.75) 82(10.55,-4.25) 83(10.55,-3.75) 84(10.55,-3.25) 85(10.55,-2.75) 86(10.55,-2.25) 87(10.55,-1.75) 88(10.55,-1.25) 89(10.55,-0.75) 90(10.55,-0.25) 91(10.55,0.25) 92(10.55,0.75) 93(10.55,1.25) 94(10.55,1.75) 95(10.55,2.25) 96(10.55,2.75) 97(10.55,3.25) 98(10.55,3.75) 99(10.55,4.25) 100(10.55,4.75) 101(10.55,5.25) 102(10.55,5.75) 103(10.55,6.25) 104(10.55,6.75) 105(10.55,7.25) 106(10.55,7.75) 107(10.55,8.25) 108(10.55,8.75)
  oval 0.3x1.8 smd: 37(-8.75,-10.55) 38(-8.25,-10.55) 39(-7.75,-10.55) 40(-7.25,-10.55) 41(-6.75,-10.55) 42(-6.25,-10.55) 43(-5.75,-10.55) 44(-5.25,-10.55) 45(-4.75,-10.55) 46(-4.25,-10.55) 47(-3.75,-10.55) 48(-3.25,-10.55) 49(-2.75,-10.55) 50(-2.25,-10.55) 51(-1.75,-10.55) 52(-1.25,-10.55) 53(-0.75,-10.55) 54(-0.25,-10.55) 55(0.25,-10.55) 56(0.75,-10.55) 57(1.25,-10.55) 58(1.75,-10.55) 59(2.25,-10.55) 60(2.75,-10.55) 61(3.25,-10.55) 62(3.75,-10.55) 63(4.25,-10.55) 64(4.75,-10.55) 65(5.25,-10.55) 66(5.75,-10.55) 67(6.25,-10.55) 68(6.75,-10.55) 69(7.25,-10.55) 70(7.75,-10.55) 71(8.25,-10.55) 72(8.75,-10.55) 109(8.75,10.55) 110(8.25,10.55) 111(7.75,10.55) 112(7.25,10.55) 113(6.75,10.55) 114(6.25,10.55) 115(5.75,10.55) 116(5.25,10.55) 117(4.75,10.55) 118(4.25,10.55) 119(3.75,10.55) 120(3.25,10.55) 121(2.75,10.55) 122(2.25,10.55) 123(1.75,10.55) 124(1.25,10.55) 125(0.75,10.55) 126(0.25,10.55) 127(-0.25,10.55) 128(-0.75,10.55) 129(-1.25,10.55) 130(-1.75,10.55) 131(-2.25,10.55) 132(-2.75,10.55) 133(-3.25,10.55) 134(-3.75,10.55) 135(-4.25,10.55) 136(-4.75,10.55) 137(-5.25,10.55) 138(-5.75,10.55) 139(-6.25,10.55) 140(-6.75,10.55) 141(-7.25,10.55) 142(-7.75,10.55) 143(-8.25,10.55) 144(-8.75,10.55)
  silkscreen extent -10.67,-9.25 9.25,9.57, body extent -10,-10 10,10, height 1.6
TQFP-PT100_N [mm] "Thin QFP, 100-Leads, Body 12x12mm, Pitch 0.4mm, IPC Medium Density"
  oval 1.8x0.24 smd: 1(-6.55,4.8) 2(-6.55,4.4) 3(-6.55,4) 4(-6.55,3.6) 5(-6.55,3.2) 6(-6.55,2.8) 7(-6.55,2.4) 8(-6.55,2) 9(-6.55,1.6) 10(-6.55,1.2) 11(-6.55,0.8) 12(-6.55,0.4) 13(-6.55,0) 14(-6.55,-0.4) 15(-6.55,-0.8) 16(-6.55,-1.2) 17(-6.55,-1.6) 18(-6.55,-2) 19(-6.55,-2.4) 20(-6.55,-2.8) 21(-6.55,-3.2) 22(-6.55,-3.6) 23(-6.55,-4) 24(-6.55,-4.4) 25(-6.55,-4.8) 51(6.55,-4.8) 52(6.55,-4.4) 53(6.55,-4) 54(6.55,-3.6) 55(6.55,-3.2) 56(6.55,-2.8) 57(6.55,-2.4) 58(6.55,-2) 59(6.55,-1.6) 60(6.55,-1.2) 61(6.55,-0.8) 62(6.55,-0.4) 63(6.55,0) 64(6.55,0.4) 65(6.55,0.8) 66(6.55,1.2) 67(6.55,1.6) 68(6.55,2) 69(6.55,2.4) 70(6.55,2.8) 71(6.55,3.2) 72(6.55,3.6) 73(6.55,4) 74(6.55,4.4) 75(6.55,4.8)
  oval 0.24x1.8 smd: 26(-4.8,-6.55) 27(-4.4,-6.55) 28(-4,-6.55) 29(-3.6,-6.55) 30(-3.2,-6.55) 31(-2.8,-6.55) 32(-2.4,-6.55) 33(-2,-6.55) 34(-1.6,-6.55) 35(-1.2,-6.55) 36(-0.8,-6.55) 37(-0.4,-6.55) 38(0,-6.55) 39(0.4,-6.55) 40(0.8,-6.55) 41(1.2,-6.55) 42(1.6,-6.55) 43(2,-6.55) 44(2.4,-6.55) 45(2.8,-6.55) 46(3.2,-6.55) 47(3.6,-6.55) 48(4,-6.55) 49(4.4,-6.55) 50(4.8,-6.55) 76(4.8,6.55) 77(4.4,6.55) 78(4,6.55) 79(3.6,6.55) 80(3.2,6.55) 81(2.8,6.55) 82(2.4,6.55) 83(2,6.55) 84(1.6,6.55) 85(1.2,6.55) 86(0.8,6.55) 87(0.4,6.55) 88(0,6.55) 89(-0.4,6.55) 90(-0.8,6.55) 91(-1.2,6.55) 92(-1.6,6.55) 93(-2,6.55) 94(-2.4,6.55) 95(-2.8,6.55) 96(-3.2,6.55) 97(-3.6,6.55) 98(-4,6.55) 99(-4.4,6.55) 100(-4.8,6.55)
  silkscreen extent -6.68,-5.25 5.25,5.59, body extent -6,-6 6,6, height 1.2
"XBee Pro S1 Wireless Module" [mm]
  rect 1.2x1.2 hole 0.6: 1(-11,9)
  round 1.2 hole 0.6: 2(-11,7) 3(-11,5) 4(-11,3) 5(-11,1) 6(-11,-1) 7(-11,-3) 8(-11,-5) 9(-11,-7) 10(-11,-9) 11(11,-9) 12(11,-7) 13(11,-5) 14(11,-3) 15(11,-1) 16(11,1) 17(11,3) 18(11,5) 19(11,7) 20(11,9)
  silkscreen extent -12.19,-16 12.19,17
"XT9M20ANA8M - 8MHz Capacitor" [mm]
  rect 6x2 smd: 1(-4.5,0) 2(4.5,0)
  silkscreen extent -5.7,-2.35 5.7,2.35

## Part data
BB JEPC: "Header, 5-Pin, Dual row"
C1 C3 C11 C14 C16 C18 C20 C30 C39 C41 C42 C44 C45 C46 C47 C48 C69 C73 C77: library part SMD_Cap_Tantalum, "Tantalum Capacitor - Case A"
C2 C4 C5 C6 C7 C8 C9 C12 C13 C15 C17 C19 C21 C22 C23 C24 C25 C26 C27 C28 C29 C31 C32 C33 C34 C35 C38 C40 C43 C49 C56 C57 C58 C59 C60 C61 C62 C63 C64 C65 C66 C67 C68 C70 C71 C72 C74 C75 C76 C78 C79: library part Cap, "Capacitor"
C10 C36 C37: library part "Cap Pol1", "Polarized Capacitor (Radial)"
D1 D3: "40V 5A Scottky Diode"
D2: "3.3V 1.5W Zener Diode"
Debug1 Debug4: library part "Header 4", "Header, 4-Pin"
Debug2 Debug3 Debug5 Debug6: library part "Header 3", "Header, 3-Pin"
FPGA1: "Cyclone II Family, 1.2V FPGA, 85 I/O Pins, 2 PLLs, 144-Pin TQFP, Speed Grade 8, Commercial Grade, Pb-Free"
H1: "DC Power Jack"
Header2: "Header, 6-Pin"
Header3 Header4 Header5 Header6: "Header, 3-Pin, Right Angle"
Header7: "Header, 20-Pin, Dual row, Right Angle"
Header9: library part "PC Wire Connector"
"Header 8": library part "Header 6", "Header, 6-Pin"
IC1: "Three-Axis Digital Output MEMS Gyroscope"
IC2: "3-Axis, 12-bit/8-bit Digital Accelerometer"
IC3 IC4: "128MB 104-MHz SPI Flash Memory"
IC5: "Miniature SPI Digital Barometer"
IC6: "3-Axis Digital Compass IC"
IC7: "High Performance 80 MHz MIPS-Based 32-Bit Flash Microcontroller with USB, CAN and Ethernet, 512KB Program Memory, 100-pin TQFP, Industrial Temperature"
IC8: "16MB FPGA CONFIGURATION DEVICE"
IC9: "EconOscillator Frequency Synthesizer"
J1 J2 J3 J4 J5 J6: "Jumper Wire"
LED1 LED2: library part HSMF-C157, "Surface Mount Chip LED"
LED3: library part "SMD LED", "Surface Mount Chip LED"
Module3: "MicroSD SPI Interface"
Module4: "XBee Pro S1 60mW Wireless Module"
Module5: "Digital Humidity & Temp Sensor"
Module6: library part "Mini USB Connector"
R1 R2 R3 R6 R7 R8 R9 R10 R11 R12 R14 R15 R16 R17 R18 R19 R20 R21 R28: library part Res2, "Resistor"
R4 R5 R13 R27 R29 R30: library part "SMD Resistor Array", "4-Count Resistor Array"
REG1: "Dual 300mA LDO (Lead Free Compliant)"
REG2 REG4: "3.0A LDO Fixed Volt.(ROHS Compliant)"
REG3: "Dual Supply, LV 3.0A LDO(ROHS Compliant)"
S1: "DIP Switch"
S2 S3 S4: library part SW-SPST, "Single-Pole, Single-Throw Switch"
X1: "8MHz SMD Crystal"
X2: "32.768KHz 7pF SMD Crystal"
X3: "OSCILLATOR 25.1750MHZ SMD"

## Nets (pads, with @x,y where several pads share a name; then routed paths per layer and width w, separated by ;. In a path a pad name is that pad's centre, name@x,y a point inside that pad or via, vN(x,y) a via of type N, cw(c..) or ccw(c..) an arc to the next point about the centre after c; other vN are vias at no path point)
25MHZ_CLOCK: FPGA1.17 X3.3
+1.2V: C46.1 C56.1 C60.1 C65.1 C70.1 C74.1 C76.1 C77.1 FPGA1.26 FPGA1.35 FPGA1.37 FPGA1.50 FPGA1.62 FPGA1.81 FPGA1.107 FPGA1.109 FPGA1.124 FPGA1.131 Header7.2 REG3.5
+1.5V: C44.1 Header7.4 REG1.7
+2.8V: C42.1 C57.1 C61.1 C66.1 C69.1 FPGA1.77 FPGA1.95 FPGA1.102 Header7.6 REG1.8
+3.3V: "Header 8.2" BB.4 C1.1 C2.2 C3.1 C4.1 C8.1 C12.1 C13.1 C14.1 C15.2 C17.1 C18.1 C19.2 C21.1 C23.2 C24.1 C25.1 C26.1 C27.1 C28.1 C29.1 C47.1 C58.1 C59.1 C62.1 C63.1 C64.1 C67.1 C68.1 C71.1 C72.1 C73.1 C75.1 FPGA1.5 FPGA1.23 FPGA1.29 FPGA1.46 FPGA1.54 FPGA1.66 FPGA1.116 FPGA1.127 FPGA1.138 Header1.1 Header1.2 Header2.1 Header7.8 IC1.1 IC1.15 IC1.16 IC2.1 IC2.14 IC3.7 IC3.8 IC4.7 IC4.8 IC5.1 IC6.2 IC6.4 IC6.13 IC7.2 IC7.16 IC7.37 IC7.46 IC7.55 IC7.62 IC7.86 IC8.3 IC8.7 IC8.8 J1.1 J2.1 J3.1 J4.1 JEPC.4 Module2.4 Module2.5 Module2.6 Module2.8 Module3.4 Module4.1 Module5.1 R1.2 R2.1 R8.1 R9.1 R10.2 R11.2 R12.2 R16.2 R17.2 R21.2 R27.5 R27.6 R27.7 R27.8 R28.1 REG4.3 S1.1 S1.2 S1.3 S1.4 S2.1 S3.1 S4.1 X3.1 X3.4
+5.0V: C9.2 C10.1 C11.1 C39.1 C41.1 C45.1 C48.1 C78.2 C79.2 Header7.10 IC9.3 J5.2 J6.2 Module1.1 R29.1 R29.2 REG1.1 REG2.3 REG3.1 REG3.2 REG3.4
ACCEL_INT1: FPGA1.55 Header2.5 IC2.11
ACCEL_INT2: FPGA1.57 Header2.4 IC2.9
ACCEL_SA0: FPGA1.53 IC2.7
ACCEL_SCL: FPGA1.43 Header2.3 IC2.4 R1.1
ACCEL_SDA: FPGA1.44 Header2.2 IC2.6 R2.2
ASDO: FPGA1.1 IC8.5 JEPC.9
BAROMETER_/CS: IC5.5 IC7.76
BAROMETER_/SHDN: IC5.4 IC7.38
BAROMETER_DIN: Debug1.2 IC4.5 IC5.7 IC7.72 Module3.3
BAROMETER_DOUT: Debug1.3 IC4.2 IC5.6 IC7.9 Module3.7
BAROMETER_SCLK: Debug1.4 IC4.6 IC5.8 IC7.70 Module3.5
BLED_BLUE1: FPGA1.69 Header7.34
BLED_BLUE2: FPGA1.70 Header7.36
BLED_BLUE3: FPGA1.71 Header7.38
BLED_BLUE4: FPGA1.72 Header7.40
BLED_ORANGE1: FPGA1.63 Header7.26
BLED_ORANGE2: FPGA1.64 Header7.28
BLED_ORANGE3: FPGA1.65 Header7.30
BLED_ORANGE4: FPGA1.67 Header7.32
BULTRASONIC_EDGE: FPGA1.60 Header7.16
BULTRASONIC_TRIGGER: FPGA1.59 Header7.14
CAMERA_DCLK: FPGA1.92 Header7.23
CAMERA_DOUT0: FPGA1.93 Header7.25
CAMERA_DOUT1: FPGA1.94 Header7.27
CAMERA_DOUT2: FPGA1.96 Header7.29
CAMERA_DOUT3: FPGA1.97 Header7.31
CAMERA_DOUT4: FPGA1.99 Header7.33
CAMERA_DOUT5: FPGA1.100 Header7.35
CAMERA_DOUT6: FPGA1.101 Header7.37
CAMERA_DOUT7: FPGA1.103 Header7.39
CAMERA_EXTCLK: FPGA1.79 Header7.17
CAMERA_HD: FPGA1.86 Header7.19
CAMERA_RESET: FPGA1.75 Header7.15
CAMERA_SCL: FPGA1.73 Header7.11
CAMERA_SDA: FPGA1.74 Header7.13
CAMERA_VD: FPGA1.87 Header7.21
CLOCK_SYNTH_0: FPGA1.21 IC9.2
CLOCK_SYNTH_1: FPGA1.91 IC9.1
CONF_DONE: FPGA1.83 JEPC.3 R28.2
CONFSWITCH_1: FPGA1.3 R4.4 S1.8
CONFSWITCH_2: FPGA1.4 R4.3 S1.7
CONFSWITCH_3: FPGA1.7 R4.2 S1.6
CONFSWITCH_4: FPGA1.8 R4.1 S1.5
CONFSWITCH_5: FPGA1.9 R5.3 S2.2
CONFSWITCH_6: FPGA1.24 R5.2 S3.2
CONFSWITCH_7: FPGA1.25 R5.1 S4.2
DATAO: FPGA1.14 IC8.2 JEPC.7
DCLK: FPGA1.15 IC8.6 JEPC.1
DS1085_SCL: Debug2.3 IC6.1 IC7.66 IC9.8 R11.1 R29.5
DS1085_SDA: Debug2.2 IC6.16 IC7.67 IC9.7 R12.1 R29.6
FPGA_A-/D: FPGA1.122 IC7.18
FPGA_D0: FPGA1.112 IC7.93
FPGA_D1: FPGA1.113 IC7.94
FPGA_D2: FPGA1.114 IC7.98
FPGA_D3: FPGA1.115 IC7.99
FPGA_D4: FPGA1.118 IC7.100
FPGA_D5: FPGA1.119 IC7.3
FPGA_D6: FPGA1.120 IC7.4
FPGA_D7: FPGA1.121 IC7.5
FPGA_OK-IN: FPGA1.129 IC7.88
FPGA_OK-OUT: FPGA1.126 IC7.87
FPGA_R-/W: FPGA1.125 IC7.19
FPGA_SPI_/GYROCS: FPGA1.45 Header1.19 IC1.5
FPGA_SPI_/SRAMCS: FPGA1.51 IC3.1
FPGA_SPI_CLOCK: FPGA1.40 Header1.20 IC1.2 IC3.6
FPGA_SPI_DATAIN: FPGA1.41 Header1.21 IC1.3 IC3.5
FPGA_SPI_DATAOUT: FPGA1.42 Header1.22 IC1.4 IC3.2
FPGASRAM_/WP: FPGA1.52 IC3.3
FULTRASONIC_EDGE: FPGA1.32 Module1.3
FULTRASONIC_TRIGGER: FPGA1.31 Module1.2
GND: "Header 8.3" BB.2 BB.10 C2.1 C3.2 C4.2 C5.1 C7.2 C8.2 C9.1 C10.2 C11.2 C12.2 C13.2 C14.2 C15.1 C16.2 C17.2 C18.2 C19.1 C20.2 C21.2 C23.1 C24.2 C25.2 C26.2 C27.2 C28.2 C29.2 C30.2 C31.2 C32.1 C33.1 C34.1 C35.1 C36.2 C37.2 C38.1 C39.2 C40.1 C41.2 C42.2 C43.2 C44.2 C45.2 C46.2 C47.2 C48.2 C49.1 C56.2 C57.2 C58.2 C59.2 C60.2 C61.2 C62.2 C63.2 C64.2 C65.2 C66.2 C67.2 C68.2 C69.2 C70.2 C71.2 C72.2 C73.2 C74.2 C75.2 C76.2 C77.2 C78.1 C79.1 D2.A Debug1.1 Debug2.1 Debug3.1 Debug4.1 Debug5.1 Debug6.1 FPGA1.6 FPGA1.19 FPGA1.27 FPGA1.33 FPGA1.34 FPGA1.36 FPGA1.38 FPGA1.39 FPGA1.49 FPGA1.56 FPGA1.61 FPGA1.68 FPGA1.78 FPGA1.80 FPGA1.98 FPGA1.105 FPGA1.106 FPGA1.108 FPGA1.110 FPGA1.111 FPGA1.117 FPGA1.123 FPGA1.128 FPGA1.130 FPGA1.140 H1.OUT Header1.13 Header2.6 Header3.3 Header4.3 Header5.3 Header6.3 Header7.1 Header7.3 Header7.5 Header7.7 Header7.9 Header9.R IC1.8 IC1.9 IC1.10 IC1.11 IC1.12 IC2.5 IC2.8 IC2.10 IC2.12 IC2.13 IC2.15 IC2.16 IC3.4 IC4.4 IC5.3 IC6.9 IC6.11 IC7.15 IC7.31 IC7.36 IC7.45 IC7.65 IC7.75 IC8.4 IC9.4 JEPC.2 JEPC.10 LED3.1 Module1.4 Module2.1 Module2.3 Module2.9 Module3.6 Module4.10 Module5.4 Module6.1 R3.2 R4.5 R4.6 R4.7 R4.8 R5.5 R5.6 R5.7 R6.2 R7.2 R13.5 R20.1 R29.3 R29.4 R30.5 R30.6 R30.7 R30.8 REG1.2 REG2.2 REG3.3 REG4.2 S5.1 X3.2
GPS_PPS: IC7.59 Module2.13
GPS_RXA: Debug6.3 IC7.39 Module2.15
GPS_RXB: Debug5.3 IC7.50 Module2.14
GPS_TXA: Debug6.2 IC7.40 Module2.17
GPS_TXB: Debug5.2 IC7.49 Module2.18
GPS_XRST: IC7.61 Module2.7 R8.2
GPS_XSTBY: IC7.60 Module2.10 R9.2
GYRO_DRDY: FPGA1.47 Header1.15 IC1.6
GYRO_INT1: FPGA1.48 Header1.23 IC1.7
HUMIDITY_I/O: IC7.29 Module5.2 R10.1
IC9_10K_C: IC9.5 J5.1 R29.7
IC9_10K_D: IC9.6 J6.1 R29.8
ICSP_MCLR: "Header 8.1" R18.2
ICSP_PGC: IC7.24 R15.2
ICSP_PGD: IC7.25 R14.2
MAGNET_DRDY: IC6.15 IC7.17
MCLR: IC7.13 R17.1 R18.1 S5.2
MOTOR_W1: FPGA1.141 Header3.1
MOTOR_W2: FPGA1.142 Header5.1
MOTOR_W3: FPGA1.143 Header6.1
MOTOR_W4: FPGA1.144 Header4.1
MSEL0: FPGA1.85 R30.1
MSEL1: FPGA1.84 R30.2
NCE: FPGA1.16 JEPC.6 R30.3
NCONFIG: FPGA1.20 JEPC.5 R27.1
NCSO: FPGA1.2 IC8.1 JEPC.8
NetC1_2: C1.2 IC1.13
NetC5_2: C5.2 IC2.2
NetC6_1: C6.1 C7.1 IC1.14
NetC6_2: C6.2 R3.1
NetC16_1: C16.1 IC5.2
NetC20_1: C20.1 IC6.10
NetC22_1: C22.1 IC6.12
NetC22_2: C22.2 IC6.8
NetC30_1: C30.1 IC7.85
NetC31_1: C31.1 IC7.30 R16.1
NetC40_2: C40.2 REG1.3 REG1.4 REG1.5
NetD1_0: D1.A Header9.L
NetD3_0: D3.A H1.IN
NetHeader3_2: Header3.2 J1.2
NetHeader4_2: Header4.2 J3.2
NetHeader5_2: Header5.2 J2.2
NetHeader6_2: Header6.2 J4.2
"NetHeader 8_4": "Header 8.4" R14.1
"NetHeader 8_5": "Header 8.5" R15.1
NetLED1_2: LED1.1 LED1.4 R6.1
NetLED2_2: LED2.1 LED2.4 R7.1
NetLED3_1: LED3.2 R21.1
NetModule6_4: Module6.5 R13.1 R13.2
NSTATUS: FPGA1.82 R27.2
OSC1: C32.2 IC7.63 X1.2
OSC2: C33.2 IC7.64 X1.1
P28: FPGA1.28 LED1.2 LED1.3
P30: FPGA1.30 LED2.2 LED2.3
P58: FPGA1.58
P104: FPGA1.104
P132: Debug4.4 FPGA1.132 IC7.10
P133: Debug4.2 FPGA1.133 IC7.12
P134: Debug4.3 FPGA1.134 IC7.11
P135: FPGA1.135 IC7.81
P136: FPGA1.136
P137: FPGA1.137
P139: FPGA1.139
PIC_SRAM_/CS: IC4.1 IC7.78
PIC_SRAM_/WP: IC4.3 IC7.58
PIC_UART1_/CTS: IC7.47 Module4.16
PIC_UART1_/RTS: IC7.48 Module4.12
PIC_UART1_RX: Debug3.2 IC7.52 Module4.2
PIC_UART1_TX: Debug3.3 IC7.53 Module4.3
SOSCI: C34.2 IC7.73 X2.1
SOSCO: C35.2 IC7.74 X2.2
SYS: C36.1 C37.1 C38.2 C43.1 C49.2 D1.K D3.K R19.2 REG2.1 REG4.1
SYSPOWMONITOR: D2.K IC7.23 R19.1 R20.2
TCK: BB.1 FPGA1.12 R30.4
TDI: BB.9 FPGA1.13 R27.4
TDO: BB.3 FPGA1.10
TMS: BB.5 FPGA1.11 R27.3
USB_D+: IC7.57 Module6.3
USB_D-: IC7.56 Module6.4
USD_/CS: IC7.77 Module3.2
VBUS: IC7.54 R13.6
XBEE_/DTR: IC7.92 Module4.9
XBEE_/RESET: IC7.28 Module4.5
XBEE_ASSOCIATE: IC7.91 Module4.15
pads on no net: "Header 8.6" BB.6 BB.7 BB.8 FPGA1.18 FPGA1.22 FPGA1.76 FPGA1.88 FPGA1.89 FPGA1.90 H1.NC Header1.3 Header1.4 Header1.5 Header1.6 Header1.7 Header1.8 Header1.9 Header1.10 Header1.11 Header1.12 Header1.14 Header1.16 Header1.17 Header1.18 Header1.24 Header7.12 Header7.18 Header7.20 Header7.22 Header7.24 IC2.3 IC6.3 IC6.5 IC6.6 IC6.7 IC6.14 IC7.1 IC7.6 IC7.7 IC7.8 IC7.14 IC7.20 IC7.21 IC7.22 IC7.26 IC7.27 IC7.32 IC7.33 IC7.34 IC7.35 IC7.41 IC7.42 IC7.43 IC7.44 IC7.51 IC7.68 IC7.69 IC7.71 IC7.79 IC7.80 IC7.82 IC7.83 IC7.84 IC7.89 IC7.90 IC7.95 IC7.96 IC7.97 LED3.3 LED3.4 Module1.NC Module2.2 Module2.11 Module2.12 Module2.16 Module2.19 Module2.20 Module3.1 Module3.8 Module3.SHLD Module4.4 Module4.6 Module4.7 Module4.8 Module4.11 Module4.13 Module4.14 Module4.17 Module4.18 Module4.19 Module4.20 Module5.3 Module6.2 R5.4 R5.8 R13.3 R13.4 R13.7 R13.8 REG1.6 X2.NC

## Polygon pours and split planes (outlines as drawn)
no net on Internal Plane 1 (split plane): 152.4,76.2 50.8,76.2 50.8,177.8 152.4,177.8
no net on Internal Plane 2 (split plane): 152.4,76.2 50.8,76.2 50.8,177.8 152.4,177.8

## Keep-outs
Keep-Out Layer:
  lines w0.3: 52.1,77.5 151.1,77.5 151.1,176.5 52.1,176.5 52.1,77.5 ; 52.1,77.5 52.1,74.9 49.5,74.9 49.5,77.5 52.1,77.5

## Silkscreen, mask and mechanical layers (free items; w line width, h text height)
Drill Drawing:
  text ".LEGEND" at 157.48,81.28 h1.52
  text "Drill Drawing." at 157.48,78.74 h1.52

## Dimensions
50.8,76.2 to 52.1,77.5 on Mechanical 1
50.8,76.2 to 52.1,77.5 on Mechanical 1

## Text inside footprints (layer, text, board x,y; h text height)
BB: Top Overlay "2" at 146.685,109.347 h1.27 r90; Top Overlay "1" at 149.225,109.855 h1.27 r90
C10: Top Overlay "+" at 185.382,155.587 h1.5
C36: Top Overlay "+" at 158.162,46.578 h1.5 r270
C37: Top Overlay "+" at 152.454,46.578 h1.5 r270
Header7: Top Overlay "39" at 123.19,171.577 h1.27; Top Overlay "40" at 123.19,174.117 h1.27; Top Overlay "2" at 70.358,174.117 h1.27; Top Overlay "1" at 70.358,171.577 h1.27
JEPC: Top Overlay "2" at 140.97,109.347 h1.27 r90; Top Overlay "1" at 143.51,109.855 h1.27 r90